# Altium PCB Glucometer-I.C.- RF Module.PcbDoc
Units mm, origin at the board's own origin, x right, y up, seen from the top; angles counter-clockwise.
Board outline 28.15 x 30.15 mm, 2 copper layers (Top Layer, Bottom Layer); 2 components, 9 nets, 21 pads, 0 vias.
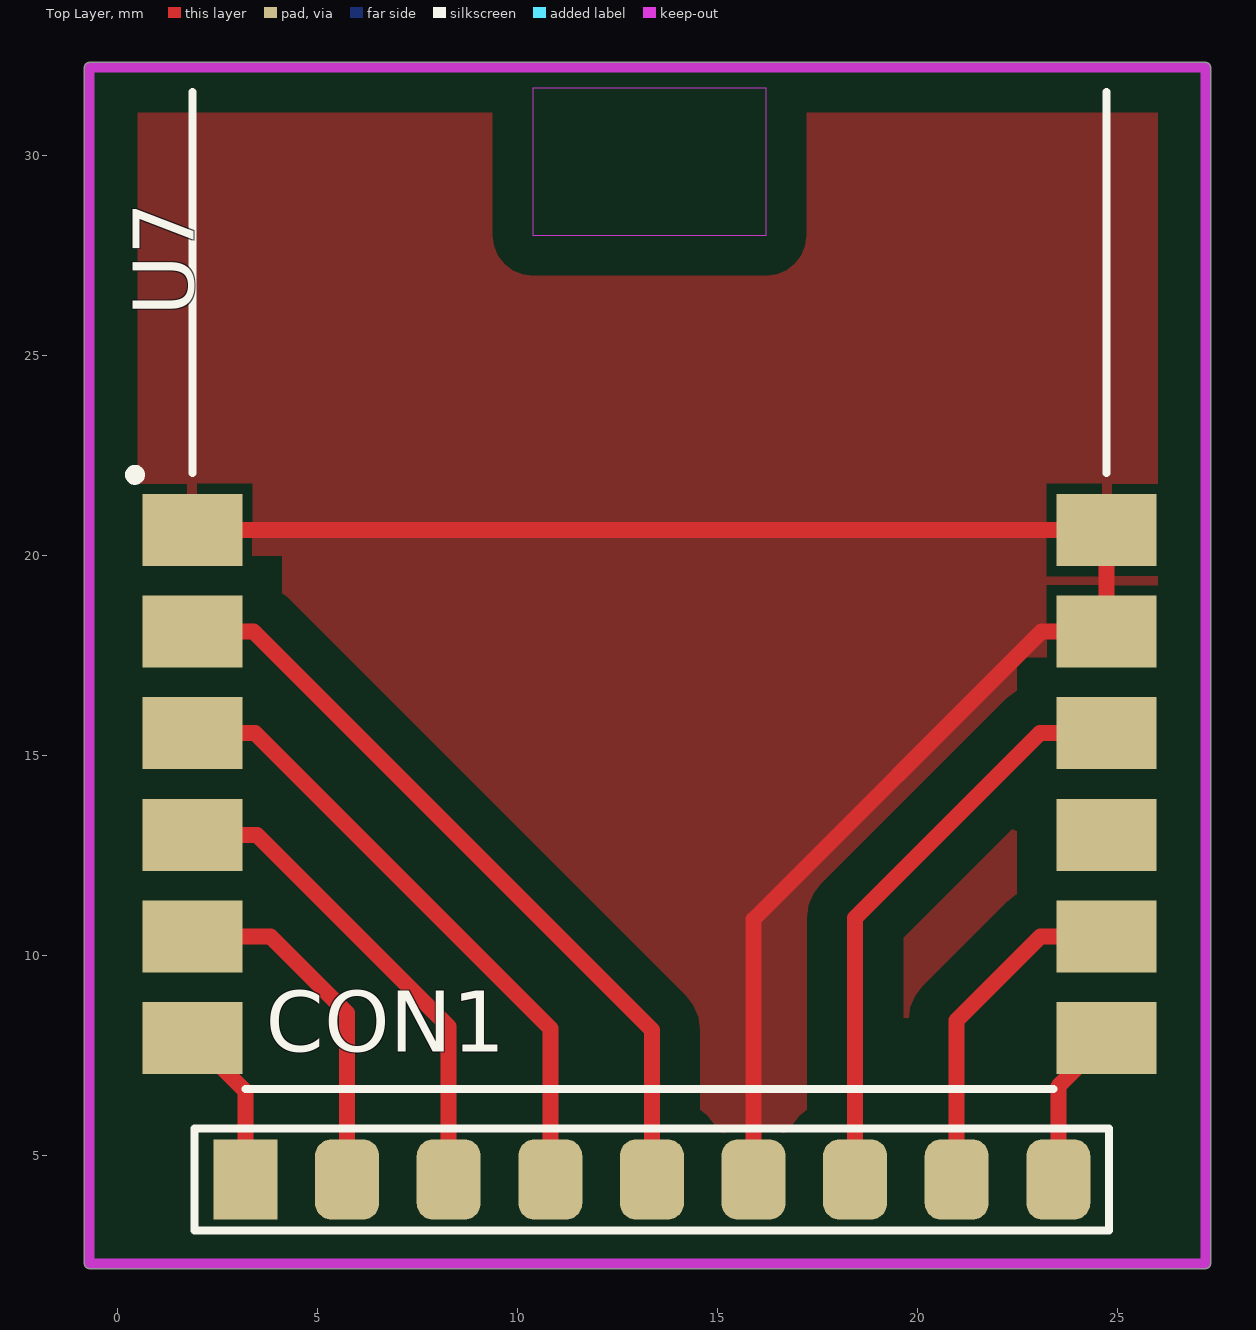
[diagram p0: Top Layer view]
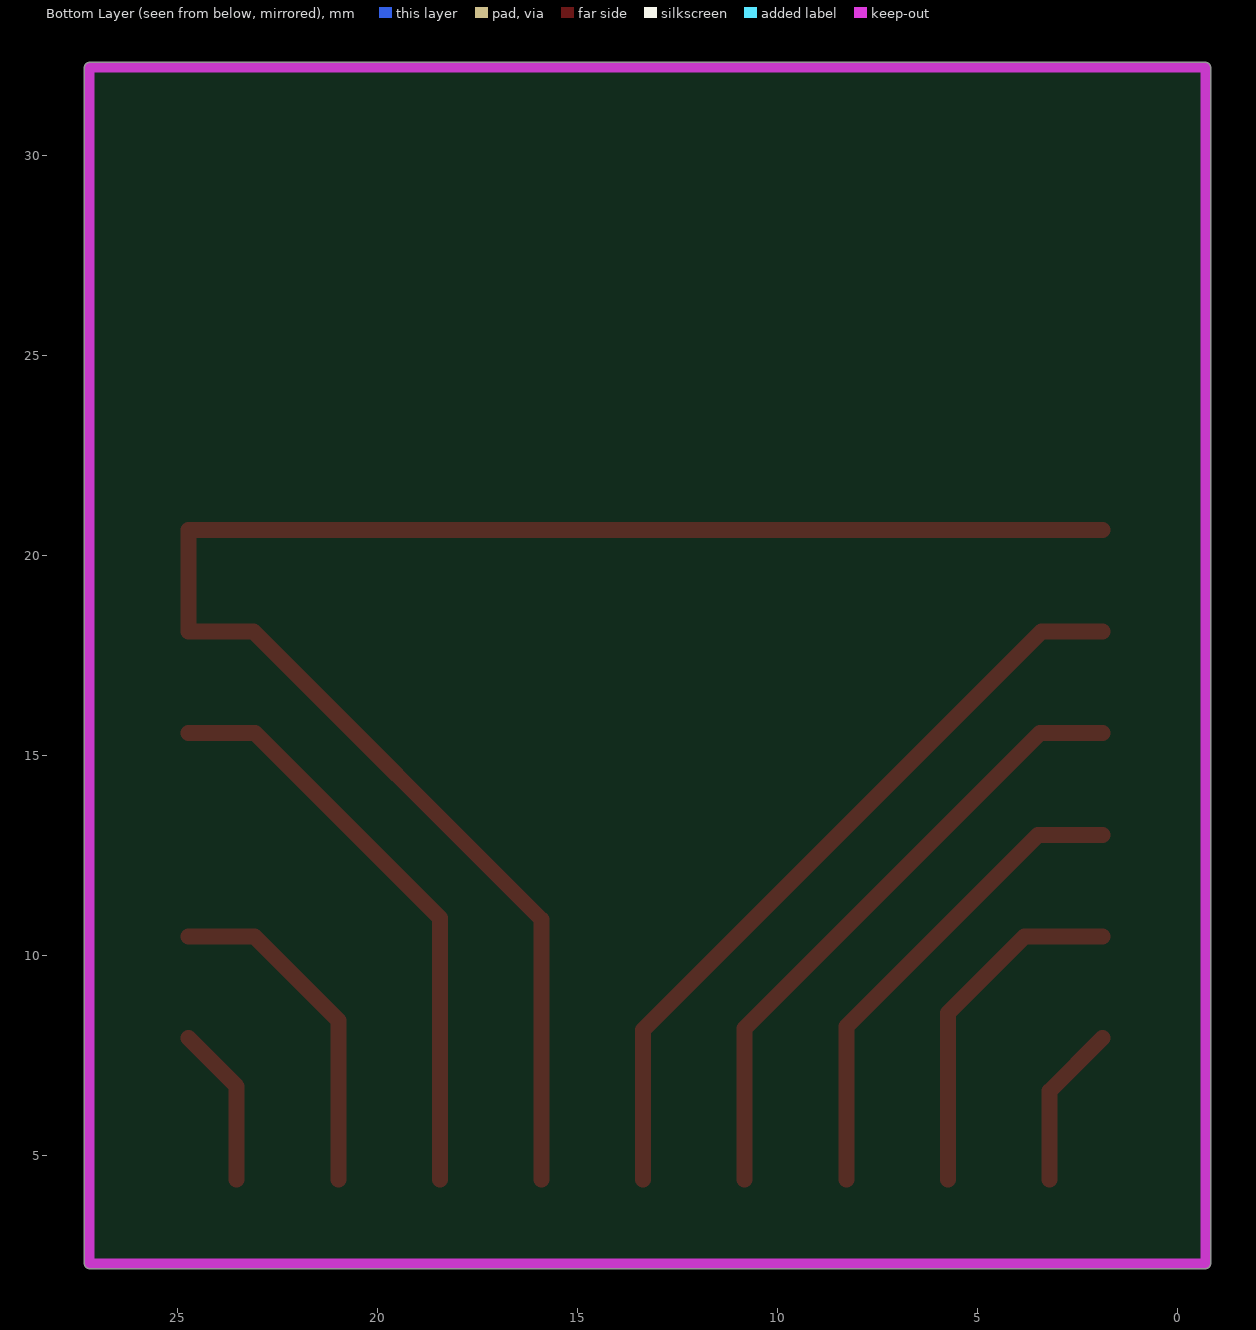
[diagram p1: Bottom Layer view, seen from below]

## Layer stack, top to bottom
Top Layer: signal copper 0.0356
Dielectric: dielectric 0.32, FR-4, Dk 4.8
Bottom Layer: signal copper 0.0356

## Board outline
-0.827,2.3 ccw(c-0.7,2.3) -0.7,2.173 27.2,2.173 ccw(c27.2,2.3) 27.327,2.3 27.327,32.2 ccw(c27.2,32.2) 27.2,32.327 -0.7,32.327 ccw(c-0.7,32.2) -0.827,32.2

## Design rules (kind name [scope] priority, off if disabled: settings)
Clearance [All] p1: gap=0.3
PolygonConnect [All] p1: connectstyle=Relief reliefconductorwidth=0.254 reliefentries=4 polygonreliefangle="90 Angle" airgapwidth=0.254
RoutingVias [All] p1: holewidth=0.711 width=1.27 viastyle="Through Hole" minholewidth=0.711 minwidth=1.27 maxholewidth=0.711 maxwidth=1.27
SolderMaskExpansion [All] p1: expansion=0.102
Width [All] p1: maxlimit=5 minlimit=0.25 preferedwidth=0.3 minimp=50.000000 maximp=50.000000 favimp=50.000000
28 further rules are at their usual default settings.

## Components (designator, comment, footprint, x,y, rotation, side; value= is the part's Value field where it differs from the comment)
CON1 "Header 9" HDR1X9 3.2,4.4 r0 top
U7 "MRF24J40MB-I/RM" MRF24J40MB 13.3,31.688 r0 top

## Footprints (in the part's own frame and the unit in brackets; to place one, negate y for a bottom-side part, rotate by r counter-clockwise, add the part's x,y. Pads: shape width x height; smd on the part's side, far side on the other; paste and mask are expansions set on the pad)
HDR1X9 [mm] "Connector; Header; 9 Position"
  rect 1.6x2 smd: 1(0,0)
  rrect50% 1.6x2 smd: 2(2.54,0) 3(5.08,0) 4(7.62,0) 5(10.16,0) 6(12.7,0) 7(15.24,0) 8(17.78,0) 9(20.32,0)
  silkscreen extent -1.27,-1.27 21.59,1.27
MRF24J40MB [mm] "SM Module; 12 Leads; Body 33x22.9x2.5mm (LxWxH), Microchip Recommended"
  rect 2.5x1.8 smd paste-4.05 mask+0.051: 1(-11.43,-11.049) 2(-11.43,-13.589) 3(-11.43,-16.129) 4(-11.43,-18.669) 5(-11.43,-21.209) 6(-11.43,-23.749) 7(11.43,-23.749) 8(11.43,-21.209) 9(11.43,-18.669) 10(11.43,-16.129) 11(11.43,-13.589) 12(11.43,-11.049)
  Top Layer keep-out region: -2.921,-3.683 2.921,-3.683 2.921,0 -2.921,0
  silkscreen extent -12.99,-25.02 11.43,-0.1, body extent -11.43,-25.02 11.43,8, height 2.54

## Part data
CON1: "Header, 9-Pin"
U7: "2.4 GHz IEEE Std. 802.15.4, 20 dBm RF Transceiver 12-Pin Module, Industrial Temperature"

## Nets (pads, with @x,y where several pads share a name; then routed paths per layer and width w, separated by ;. In a path a pad name is that pad's centre, name@x,y a point inside that pad or via, vN(x,y) a via of type N, cw(c..) or ccw(c..) an arc to the next point about the centre after c; other vN are vias at no path point)
3.3V: CON1.7 U7.10 | length 14.7
  Top Layer w0.4: CON1.7 18.44,10.94 23.059,15.559 U7.10
GND: CON1.6 U7.1 U7.11 U7.12 | length 43.7
  Top Layer w0.4: U7.1 U7.12 U7.11 23.099,18.099 15.9,10.9 CON1.6
NetCON1_1: CON1.1 U7.6 | length 4.1
  Top Layer w0.4: U7.6 3.2,6.609 CON1.1
NetCON1_2: CON1.2 U7.5 | length 8.8
  Top Layer w0.4: U7.5 3.821,10.479 5.74,8.56 CON1.2
NetCON1_3: CON1.3 U7.4 | length 12.2
  Top Layer w0.4: U7.4 3.481,13.019 8.28,8.22 CON1.3
NetCON1_4: CON1.4 U7.3 | length 15.8
  Top Layer w0.4: U7.3 3.441,15.559 10.82,8.18 CON1.4
NetCON1_5: CON1.5 U7.2 | length 19.4
  Top Layer w0.4: U7.2 3.401,18.099 13.36,8.14 CON1.5
NetCON1_8: CON1.8 U7.8 | length 8.6
  Top Layer w0.4: CON1.8 20.98,8.38 23.079,10.479 U7.8
NetCON1_9: CON1.9 U7.7 | length 4
  Top Layer w0.4: CON1.9 23.52,6.729 U7.7
pads on no net: U7.9

## Polygon pours and split planes (outlines as drawn)
GND on Top Layer "Bottom Layer-No Net" (solid, pour order 3): 0.5,31.5 26,31.5 26,3 0.5,3

## Keep-outs
Keep-Out Layer:
  lines w0.254: -0.7,2.3 -0.7,32.2 27.2,32.2 27.2,2.3 -0.7,2.3

## Dimensions
27.2,32.2 to 27.2,2.3 on Keep-Out Layer
-0.7,2.3 to 27.2,2.3 on Keep-Out Layer
24.8,39.688 to 27.2,2.3 on Top Overlay